# Altium PCB MI.PcbDoc
Units mil, origin at the board's own origin, x right, y up, seen from the top; angles counter-clockwise.
Board outline 3031.5 x 1181.1 mil, 2 copper layers (Top Layer, Bottom Layer); 112 components, 66 nets, 394 pads, 90 vias.
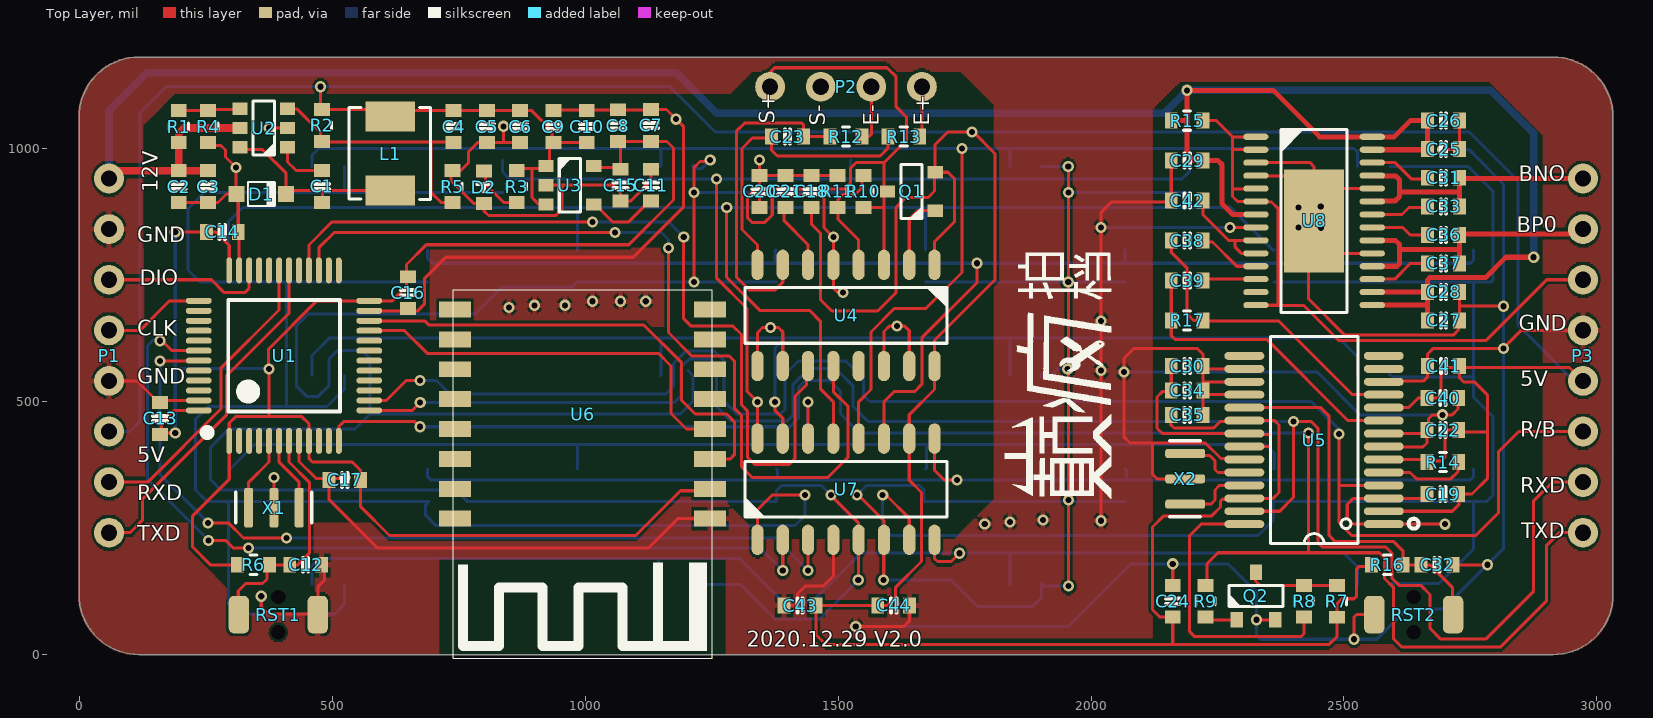
[diagram p0: Top Layer view]
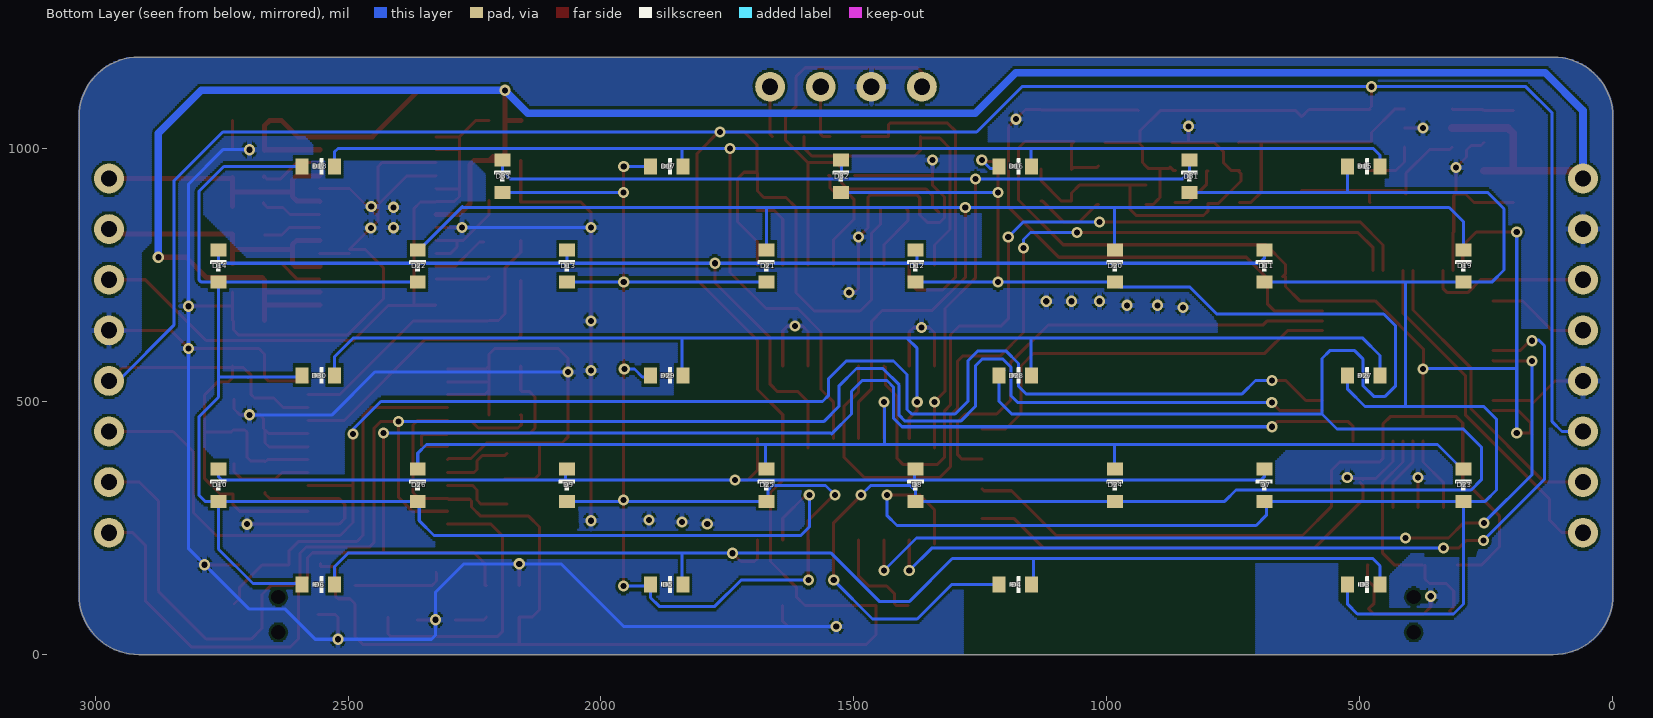
[diagram p1: Bottom Layer view, seen from below]

## Layer stack, top to bottom
Top Solder: solder mask 0.4, Solder Resist, Dk 3.5
Top Layer: signal copper 1.4
Dielectric 1: dielectric 12.6, FR-4, Dk 4.8
Bottom Layer: signal copper 1.4
Bottom Solder: solder mask 0.4, Solder Resist, Dk 3.5

## Board outline
118.11,-0.55 cw(c118.11,117.56) 0,117.56 0,1062.44 cw(c118.11,1062.44) 118.11,1180.55 2913.39,1180.55 cw(c2913.39,1062.44) 3031.5,1062.44 3031.5,117.56 cw(c2913.39,117.56) 2913.39,-0.55

## Design rules (kind name [scope] priority, off if disabled: settings)
Clearance [All] p1: gap=5 ignorepadtopadclearanceinfootprint=TRUE
PlaneClearance [All] p1: clearance=5
PlaneConnect [All] p1: planeconnectstyle=Relief reliefexpansion=10 reliefentries=4 reliefconductorwidth=6 reliefairgap=5
PolygonConnect [All] p1: connectstyle=Relief reliefconductorwidth=10 reliefentries=4 polygonreliefangle="90 Angle" airgapwidth=5
RoutingVias [All] p1: holewidth=12 width=22 viastyle="Through Hole" minholewidth=12 minwidth=22 maxholewidth=12 maxwidth=22
SolderMaskExpansion [All] p1: expansion=4
Width [All] p1: maxlimit=15 minlimit=6 preferedwidth=6
28 further rules are at their usual default settings.

## Components (designator, comment, footprint, x,y, rotation, side; value= is the part's Value field where it differs from the comment)
C1 "104" CAP-0603-L 480,925 r90 top
C2 "106" CAP-0603-L 196.85,924.55 r90 top
C3 "104" CAP-0603-L 255,924.55 r90 top
C4 "33pF" CAP-0603-L 740,1043.31 r90 top
C5 "104" CAP-0603-L 805.83,1043.31 r90 top
C6 "106" CAP-0603-L 871.67,1043.31 r90 top
C7 "104" CAP-0603-L 1130,1045.43 r90 top
C8 "106" CAP-0603-L 1065,1045 r270 top
C9 "106" CAP-0603-L 937.5,1043.31 r270 top
C10 "104" CAP-0603-L 1003.33,1043.31 r270 top
C11 "22nF" CAP-0603-L 1130,927.43 r90 top
C12 "0.1uF" CAP-0603-L 447.76,177.17 r0 top
C13 "104" CAP-0603-L 160,466.5 r90 top
C14 "104" CAP-0603-L 283,835 r0 top
C15 "104" CAP-0603-L 1070,927.43 r270 top
C16 "104" CAP-0603-L 650,715 r270 top
C17 "104" CAP-0603-L 525,345 r180 top
C18 "10uF" CAP-0603-L 1447.5,915 r270 top
C19 "0.1uF" CAP-0603-L 2695.41,317.06 r180 top
C20 "10uF" CAP-0603-L 1345,915 r270 top
C21 "0.1uF" CAP-0603-L 1396.25,915 r90 top
C22 "0.1uF" CAP-0603-L 2695.41,443.53 r180 top
C23 "0.1uF" CAP-0603-L 1400,1023.62 r180 top
C24 "0.1uF" CAP-0603-L 2161.56,105 r90 top
C25 "0.1uF" CAP-0603-L 2696.83,998.57 r0 top
C26 "0.1uF" CAP-0603-L 2696.83,1055 r0 top
C27 "10F" CAP-0603-L 2696.83,660 r0 top
C28 "01uF" CAP-0603-L 2696.83,716.43 r0 top
C29 "0.1uF" CAP-0603-L 2190.11,976 r0 top
C30 "0.1uF" CAP-0603-L 2190.11,570.01 r0 top
C31 "0.1uF" CAP-0603-L 2696.83,942.14 r0 top
C32 "0.1uF" CAP-0603-L 2684.02,177.17 r0 top
C33 "0.1uF" CAP-0603-L 2696.83,885.71 r0 top
C34 "47uF" CAP-0603-L 2190.11,521.8 r0 top
C35 "0.1uF" CAP-0603-L 2190.11,473.59 r0 top
C36 "0.1uF" CAP-0603-L 2696.83,829.29 r0 top
C37 "0.1uF" CAP-0603-L 2696.83,772.86 r0 top
C38 "1uF" CAP-0603-L 2190.11,818 r180 top
C39 "1uF" CAP-0603-L 2190.11,739 r180 top
C40 "47uF" CAP-0603-L 2695.41,506.77 r0 top
C41 "0.1uF" CAP-0603-L 2696.83,570.01 r180 top
C42 "1uF" CAP-0603-L 2190.11,897 r0 top
C43 "47uF" CAP-0603-L 1425,96.67 r180 top
C44 "0.1uF" CAP-0603-L 1610,96.67 r0 top
D1 "B5819WS" SOD_323 360,910 r180 top
D2 "LED_Power" LED_0603-L 800,923.56 r90 top
D3 "LED_Power" LED_0603-L 492.13,137.8 r180 bottom
D4 "LED_Power" LED_0603-L 1181.1,137.8 r180 bottom
D5 "LED_Power" LED_0603-L 1870.08,137.8 r180 bottom
D6 "LED_Power" LED_0603-L 2559.06,137.8 r180 bottom
D7 "LED_Power" LED_0603-L 688.98,334.65 r90 bottom
D8 "LED_Power" LED_0603-L 1377.95,334.65 r90 bottom
D9 "LED_Power" LED_0603-L 2066.93,334.65 r90 bottom
D10 "LED_Power" LED_0603-L 2755.91,334.65 r90 bottom
D11 "LED_Power" LED_0603-L 688.98,767.72 r90 bottom
D12 "LED_Power" LED_0603-L 1377.95,767.72 r90 bottom
D13 "LED_Power" LED_0603-L 2066.93,767.72 r90 bottom
D14 "LED_Power" LED_0603-L 2755.91,767.72 r90 bottom
D15 "LED_Power" LED_0603-L 492.13,964.57 r180 bottom
D16 "LED_Power" LED_0603-L 1181.1,964.57 r180 bottom
D17 "LED_Power" LED_0603-L 1870.08,964.57 r180 bottom
D18 "LED_Power" LED_0603-L 2559.06,964.57 r180 bottom
D19 "LED_Power" LED_0603-L 295.28,767.72 r90 bottom
D20 "LED_Power" LED_0603-L 984.25,767.72 r90 bottom
D21 "LED_Power" LED_0603-L 1673.23,767.72 r90 bottom
D22 "LED_Power" LED_0603-L 2362.2,767.72 r90 bottom
D23 "LED_Power" LED_0603-L 295.28,334.65 r90 bottom
D24 "LED_Power" LED_0603-L 984.25,334.65 r90 bottom
D25 "LED_Power" LED_0603-L 1673.23,334.65 r90 bottom
D26 "LED_Power" LED_0603-L 2362.2,334.65 r90 bottom
D27 "LED_Power" LED_0603-L 492.13,551.18 r180 bottom
D28 "LED_Power" LED_0603-L 1181.1,551.18 r180 bottom
D29 "LED_Power" LED_0603-L 1870.08,551.18 r180 bottom
D30 "LED_Power" LED_0603-L 2559.06,551.18 r180 bottom
D31 "LED_Power" LED_0603-L 836.61,944.88 r90 bottom
D32 "LED_Power" LED_0603-L 1525.59,944.88 r90 bottom
D33 "LED_Power" LED_0603-L 2194.88,944.88 r90 bottom
L1 "MHCI04020-100M-R8" L-0420 615,990 r90 top
P1 "DIP 1x8" HDR1X8_2.54_180 59.06,590.55 r180 top value=2.54
P2 "HDR1x4_2.54" HDR1X4_2.54_180 1515.75,1122.05 r270 top
P3 "DIP 1x8" HDR1X8_2.54_180 2972.44,590.55 r0 top value=2.54
Q1 "PNP" SOT-23-3 1645,915 r0 top
Q2 "SS8050" SOT-23-3 2326.12,115.47 r270 top
R1 "100K" R-0603-L 196.85,1043.31 r270 top
R2 "124K" R-0603-L 480,1045.45 r90 top
R3 "4.7K" R-0603-L 865,924.55 r90 top
R4 "30K" R-0603-L 255,1043.31 r90 top
R5 "23.7K" R-0603-L 737.91,924.55 r270 top
R6 "10K" R-0603-L 344.65,177.17 r0 top
R7 "1K" R-0603-L 2486.12,105 r270 top
R8 "1K" R-0603-L 2421.12,105 r90 top
R9 "1K" R-0603-L 2226.12,105 r90 top
R10 "10K" R-0603-L 1550,915 r270 top
R11 "10K" R-0603-L 1498.75,915 r270 top
R12 "1K" R-0603-L 1515.75,1023.62 r180 top
R13 "1K" R-0603-L 1630,1023.62 r180 top
R14 "10K" R-0603-L 2695.41,380.29 r0 top
R15 "10K" R-0603-L 2190.11,1055 r180 top
R16 "10K" R-0603-L 2585.59,177.17 r0 top
R17 "10K" R-0603-L 2190.11,660 r0 top
RST1 "按键" KEY_2S 393.7,78.74 r0 top
RST2 "按键" KEY_2S 2637.8,78.74 r180 top
U1 "STM32F103Cx" LQFP_48 405,590.55 r0 top
U2 "MP2456" SOT-23-6 365,1040.43 r0 top
U3 "RT9193" SOT-23-5 970,927.43 r180 top
U4 "HX711" SOP_E150_16 1515.75,670 r180 top
U5 "SYN6288" SSOP28-26-209 2440.94,423.7 r90 top
U6 "HC-04" HC-25 995,475 r180 top
U7 "TM1650" SOP_E150_16 1515.75,326.5 r0 top
U8 "OEP30Wx2" TSSOP_E170_P0.65_28_PAD 2440.94,856.77 r0 top
X1 "8MHz" XTAL-3213-3 385,290 r180 top
X2 "16MHz" XTAL-3213-3 2186.12,347.06 r90 top

## Footprints (in the part's own frame and the unit in brackets; to place one, negate y for a bottom-side part, rotate by r counter-clockwise, add the part's x,y. Pads: shape width x height; smd on the part's side, far side on the other; paste and mask are expansions set on the pad)
CAP-0603-L [mm]
  rect 0.65x0.8 smd: 1(-0.8,0) 2(0.8,0)
  silkscreen extent -0.13,-0.35 0.13,0.35, body extent -0.8,-0.4 0.8,0.4, height 0.8
HC-25 [mm]
  rect 1.6x0.8 smd: 1(-6.4,5.25) 2(-6.4,3.75) 3(-6.4,2.25) 4(-6.4,0.75) 5(-6.4,-0.75) 6(-6.4,-2.25) 7(-6.4,-3.75) 8(-6.4,-5.25) 9(6.4,-5.25) 10(6.4,-3.75) 11(6.4,-2.25) 12(6.4,-0.75) 13(6.4,0.75) 14(6.4,2.25) 15(6.4,3.75) 16(6.4,5.25)
  silkscreen extent -6.5,-6.25 6.5,12.25
HDR1X4_2.54_180 [mm]
  round 1.5 hole 0.813: 1(0,3.81) 2(0,1.27) 3(0,-1.27) 4(0,-3.81)
  body extent -1.25,-5.08 1.25,5.08, height 8.2
HDR1X8_2.54_180 [mm]
  round 1.5 hole 0.813: 1(0,8.89) 2(0,6.35) 3(0,3.81) 4(0,1.27) 5(0,-1.27) 6(0,-3.81) 7(0,-6.35) 8(0,-8.89)
  body extent -1.25,-10.16 1.25,10.16, height 8.2
KEY_2S [mil]
  round 0 hole 28: 0(0,-35) 0(0,35)
  rrect50% 40x74 smd: 1(-78,0) 2(78,0)
  body extent -79,-49 79,49, height 63
L-0420 [mm] "4.1*4.6*2MM(长*宽*高)"
  rect 1.5x2.5 smd: 1(-1.85,0) 2(1.85,0)
  silkscreen extent -2.3,-2.02 2.3,2.07, body extent -2.28,-2.02 2.3,2.07, height 2
LED_0603-L [mm]
  rect 0.65x0.8 smd: 1(0.813,0) 2(-0.813,0)
  silkscreen extent -0.25,-0.39 0.25,0.39, body extent -0.81,-0.4 0.81,0.4, height 0.6
LQFP_48 [mm]
  oval 0.3x1.3 smd: 1(-2.75,-4.28) 2(-2.25,-4.28) 3(-1.75,-4.28) 4(-1.25,-4.28) 5(-0.75,-4.28) 6(-0.25,-4.28) 7(0.25,-4.28) 8(0.75,-4.28) 9(1.25,-4.28) 10(1.75,-4.28) 11(2.25,-4.28) 12(2.75,-4.28) 25(2.75,4.28) 26(2.25,4.28) 27(1.75,4.28) 28(1.25,4.28) 29(0.75,4.28) 30(0.25,4.28) 31(-0.25,4.28) 32(-0.75,4.28) 33(-1.25,4.28) 34(-1.75,4.28) 35(-2.25,4.28) 36(-2.75,4.28)
  oval 1.3x0.3 smd: 13(4.28,-2.75) 14(4.28,-2.25) 15(4.28,-1.75) 16(4.28,-1.25) 17(4.28,-0.75) 18(4.28,-0.25) 19(4.28,0.25) 20(4.28,0.75) 21(4.28,1.25) 22(4.28,1.75) 23(4.28,2.25) 24(4.28,2.75) 37(-4.28,2.75) 38(-4.28,2.25) 39(-4.28,1.75) 40(-4.28,1.25) 41(-4.28,0.75) 42(-4.28,0.25) 43(-4.28,-0.25) 44(-4.28,-0.75) 45(-4.28,-1.25) 46(-4.28,-1.75) 47(-4.28,-2.25) 48(-4.28,-2.75)
  silkscreen extent -3.98,-3.99 2.8,2.8, body extent -4.5,-4.5 4.5,4.5, height 1.52
R-0603-L [mm]
  rect 0.65x0.8 smd: 1(-0.8,0) 2(0.8,0)
  silkscreen extent -0.18,-0.48 0.18,0.48, body extent -0.8,-0.4 0.8,0.4, height 0.45
SOD_323 [mm]
  rect 0.8x0.8 smd: 1(1.25,0) 2(-1.25,0)
  silkscreen extent -0.72,-0.6 0.67,0.6, body extent -1.3,-0.68 1.3,0.68, height 1.1
SOP_E150_16 [mil]
  oval 24x60 smd: 1(-175,-100) 2(-125,-100) 3(-75,-100) 4(-25,-100) 5(25,-100) 6(75,-100) 7(125,-100) 8(175,-100) 9(175,100) 10(125,100) 11(75,100) 12(25,100) 13(-25,100) 14(-75,100) 15(-125,100) 16(-175,100)
  silkscreen extent -200,-55 200,55, body extent -197,-118 197,118, height 69
SOT-23-3 [mil]
  rect 30x24 smd: 1(47,-38) 2(47,38) 3(-47,0)
  silkscreen extent -21,-53 21,53, body extent -55,-57 55,57, height 51
SOT-23-5 [mil]
  rect 30x24 smd: 1(47,-38) 2(47,0) 3(47,38) 4(-47,38) 5(-47,-38)
  silkscreen extent -21,-53 21,53, body extent -55,-57 55,57, height 57
SOT-23-6 [mil]
  rect 30x24 smd: 1(47,-38) 2(47,0) 3(47,38) 4(-47,38) 5(-47,0) 6(-47,-38)
  silkscreen extent -21,-53 21,53, body extent -55,-57 55,57, height 57
SSOP28-26-209 [mm]
  oval 0.4x2 smd: 1(-4.225,-3.5) 2(-3.575,-3.5) 3(-2.925,-3.5) 4(-2.275,-3.5) 5(-1.625,-3.5) 6(-0.975,-3.5) 7(-0.325,-3.5) 8(0.325,-3.5) 9(0.975,-3.5) 10(1.625,-3.5) 11(2.275,-3.5) 12(2.925,-3.5) 13(3.575,-3.5) 14(4.225,-3.5) 15(4.225,3.5) 16(3.575,3.5) 17(2.925,3.5) 18(2.275,3.5) 19(1.625,3.5) 20(0.975,3.5) 21(0.325,3.5) 22(-0.325,3.5) 23(-0.975,3.5) 24(-1.625,3.5) 25(-2.275,3.5) 26(-2.925,3.5) 27(-3.575,3.5) 28(-4.225,3.5)
  silkscreen extent -5.2,-5.25 5.2,2.2
TSSOP_E170_P0.65_28_PAD [mil]
  oval 50x12 smd: 1(-115,166.34) 2(-115,140.75) 3(-115,115.16) 4(-115,89.57) 5(-115,63.98) 6(-115,38.39) 7(-115,12.8) 8(-115,-12.8) 9(-115,-38.39) 10(-115,-63.98) 11(-115,-89.57) 12(-115,-115.16) 13(-115,-140.75) 14(-115,-166.34) 15(115,-166.34) 16(115,-140.75) 17(115,-115.16) 18(115,-89.57) 19(115,-63.98) 20(115,-38.39) 21(115,-12.8) 22(115,12.8) 23(115,38.39) 24(115,63.98) 25(115,89.57) 26(115,115.16) 27(115,140.75) 28(115,166.34)
  rect 118.11x203.94 smd: 29(0,0)
  silkscreen extent -65,-181 65,181, body extent -126,-181 126,181, height 42
XTAL-3213-3 [mm]
  rrect50% 0.45x2 smd: 1(1.27,0) 2(0,0) 3(-1.27,0)
  silkscreen extent -1.91,-0.76 1.91,0.76, body extent -1.9,-0.8 1.9,0.8, height 1

## Part data
C1 C2 C3 C4 C5 C6 C7 C8 C9 C10 C11 C12 C13 C14 C15 C16 C17 C18 C19 C20 C21 C22 C23 C24 C25 C26 C27 C28 C29 C30 C31 C32 C33 C34 C35 C36 C37 C38 C39 C40 C41 C42 C43 C44: library part CAP
D1: library part Diode
D2 D3 D4 D5 D6 D7 D8 D9 D10 D11 D12 D13 D14 D15 D16 D17 D18 D19 D20 D21 D22 D23 D24 D25 D26 D27 D28 D29 D30 D31 D32 D33: library part LED
L1: library part Inductor, "电感"
P1 P3: library part HDR1x8_2.54, "Header", Type="DIP 1x8"
P2: "Header"
Q1: library part BJT_PNP, "Transistor"
Q2: library part BJT_NPN, "Transistor"
R1 R2 R3 R4 R5 R6 R7 R8 R9 R10 R11 R12 R13 R14 R15 R16 R17: library part Res
U2: library part MP2451
U3: library part LP5907MFX
X1 X2: library part XTAL-3215-3

## Via types
v1: diameter 22, hole 12, Top Layer to Bottom Layer, tented both sides, 90 vias

## Nets (pads, with @x,y where several pads share a name; then routed paths per layer and width w, separated by ;. In a path a pad name is that pad's centre, name@x,y a point inside that pad or via, vN(x,y) a via of type N, cw(c..) or ccw(c..) an arc to the next point about the centre after c; other vN are vias at no path point)
A: D3.1 D4.1 D5.1 D6.1 U7.8 | length 2443.7
  Top Layer w6: U7.8 1690.75,189.25 1696.49,183.51 1723.51,183.51 v1(1740,200)
  Bottom Layer w6: D3.1 460.13,175.13 475,190 1145,190 1145,189.5 ; D4.1 1145,141.9 1145,189.5 ; D5.1 1840,139.72 1840,200 ; D6.1 2527.06,172.94 2500,200 1840,200 ; 1145,189.5 1305.5,189.5 1390,105 1450,105 1545,200 v1(1740,200) 1840,200
B: D7.1 D8.1 D9.1 D10.1 U7.9 | length 2263.4
  Top Layer w6: U7.9 1690.75,363.74 1709.49,345 v1(1735,345)
  Bottom Layer w6: D7.1 688.98,351.02 695,345 1380,345 ; D8.1 1380,364.6 1380,345 ; D9.1 2070,363.57 2070,345 ; D10.1 2755.91,350.91 2750,345 2070,345 ; 1380,345 v1(1735,345) 2070,345
BN0: C38.2 R17.2 U5.11 | length 613
  Top Layer w6: C38.2 2158.61,794.72 2190,763.33 2190,672.76 2202.76,660 R17.2 2223,658.61 2371.39,658.61 2516.73,513.27 U5.11
BP0: C39.2 R17.1 U5.9 | length 598.7
  Top Layer w6: C39.2 R17.1 2158.61,629.9 2165.88,622.64 2347.36,622.64 2507.91,462.09 U5.9
C: D11.1 D12.1 D13.1 D14.1 U7.11 | length 2629.9
  Top Layer w6: U7.11@1590.75,408.5 U7.11 1590.75,499.25 1610.75,519.25 1651.25,519.25 1665.75,533.75 1665.75,625.75 1775,735 v1(1775,773.17)
  Bottom Layer w6: D11.1 688.98,782.95 698.76,773.17 1375,773.17 ; D12.1 1375,796.76 1375,773.17 ; D13.1 2066.93,773.17 ; D14.1 2755.91,779.08 2750,773.17 2066.93,773.17 ; 1375,773.17 v1(1775,773.17) 2066.93,773.17
CLK: P1.5 U1.37 | length 201.6
  Top Layer w6: P1.5 120.55,640.55 178.82,698.82 U1.37
CVDD: C30.1 C34.1 U5.21 U5.22 | length 444.9
  Top Layer w6: C30.1 C34.1 2156.81,520 2141.73,520 2130.43,508.7 2130.43,447.13 2141.06,436.5 U5.21 2304.66,434.98 2351.51,434.98 2355.03,431.47 2355.03,414.42 2351.51,410.91 U5.22
CVSS: C2.1 C3.1 C5.1 C6.1 C7.2 C8.1 C9.1 C10.1 C11.2 C12.2 C13.2 C14.2 C15.2 C16.2 C17.2 C18.1 C19.2 C20.1 C21.2 C22.2 C24.2 C25.2 C26.2 C27.2 C28.2 C29.1 C30.2 C32.2 C34.2 C35.2 C40.2 C41.2 C42.1 C43.2 C44.2 D1.1 D2.2 P1.4 P1.7 P2.3 P3.4 Q2.2 R4.1 R5.1 R11.1 RST1.2 RST2.2 U1.8 U1.23 U1.35 U1.47 U2.2 U3.2 U4.5 U4.9 U4.10 U4.14 U4.15 U5.1 U5.3 U5.7 U5.8 U5.12 U5.16 U5.17 U5.18 U5.23 U6.1 U7.4 U8.3 U8.4 U8.8 U8.19 U8.24 U8.29 X1.2 X2.2 | length 13397.3
  Top Layer w6: P1.4 114.49,540.55 157.04,498 C13.2 163.97,501.97 U1.47 ; C2.1 C3.1 274.5,893.06 291.44,910 D1.1 ; R4.1 260.81,1006 280.09,1006 289.15,996.94 289.15,983.16 v1(310,962.31) 310,910.79 D1.1 ; U1.35 316.42,833.09 C14.2 314.5,906.29 D1.1 ; v1(360,115) 360,94.24 374.24,80 470.44,80 RST1.2 482.95,89.99 471.7,101.24 471.7,133.45 485,146.75 485,176.42 C12.2@484.26,177.17 ; v1(375.47,1040.43) U2.2 ; X1.2 v1(385,350) ; U1.8 434.53,381.48 468.05,347.95 493.5,347.95 C17.2@493.5,347.66 ; C17.2 C17.2@493.5,347.66 ; C17.2@500,340 493.5,333.5 493.5,306.5 590,210 1125,210 1183.31,268.31 U6.1 ; v1(525,350) 522.66,347.66 C17.2@493.5,347.66 ; U1.23 669.13,679.13 683,693 683,743.55 724.46,785 1095,785 1195,885 1195,1042.83 v1(1180,1057.83) 1160.91,1076.93 C7.2 1128.93,1075.86 938.57,1075.86 C9.1 ; R5.1 R5.1@740.86,956.04 ; v1(838.75,1043.82) 838.75,1011.81 ; C6.1 838.75,1011.81 ; U3.2 952.57,927.43 ; C11.2 1130,936.28 1089.64,895.93 C15.2 1070,912.05 1054.62,927.43 952.57,927.43 ; U4.9 1340.75,635.85 1350.9,646 v1(1366.6,646) 1382.31,646 1390.75,637.56 U4.10 ; v1(1345,977.31) C20.1 ; C43.2 1416.49,96.67 1420,100.19 1420,120 1435.27,135.27 1471.02,135.27 1490.75,155 U7.4 ; R11.1 C18.1 C20.1 ; v1(1509.56,715.32) 1499.68,715.32 1490.75,724.25 U4.5 v1(1490.75,825) 1472.36,843.38 1472.36,903.64 1467.71,908.29 1375.79,908.29 1370,902.5 1370,868.64 1355.36,854 1330.07,854 1321,863.07 1321,903.92 1345,927.92 C20.1 ; v1(1535,55) 1630,55 1641.5,66.5 C44.2 ; U4.14 1590.75,638.25 1601.35,648.85 v1(1616.53,648.85) 1631.7,648.85 1640.75,639.8 U4.15 ; v1(2020,264.25) v1(2020,561.02) v1(2020,659.28) v1(2020,843.98) 2020,874 2040.05,894.05 2158.61,894.05 C42.1 C29.1 ; C24.2 v1(2161.56,179.07) ; X2.2@2191.12,347.06 X2.2 2130.43,347.06 2121.5,355.99 2121.5,415.92 2123.63,418.05 ; C35.2 C34.2 ; v1(2275,843.98) U8.8 ; U5.23 2301.28,387.18 2256.94,387.18 2226.07,418.05 2123.63,418.05 ; U5.18 2230.14,513.27 C34.2 ; U5.17 2221.61,538.86 ; U5.16 2227.17,564.45 C30.2 ; U8.4 2327.09,945.19 2384.44,945.19 U8.29@2440.94,888.69 ; U8.3 2433.07,971.93 2440.94,964.06 U8.29@2440.94,888.69 ; v1(2327.09,68.47) Q2.2 ; U8.29@2497,792.8 U8.19 ; v1(2520,30) 2520,73.74 2525,78.74 RST2.2 ; U8.24 2497,920.75 U8.29@2440.94,864.69 ; U5.7 2579.65,410 2655.86,410 2663.91,418.05 C22.2@2663.91,441.84 ; U5.8 2656.88,436.5 2662.22,441.84 C22.2@2663.91,441.84 ; U5.12 2579.88,540 2656.61,540 2665.33,548.72 C41.2 2665.33,593.65 2676.68,605 v1(2815,605) 2850.55,640.55 P3.4 ; C19.2@2663.91,320.01 C19.2 2655.4,308.54 U5.3 2518.54,308.54 2506.5,296.5 2506.5,268.5 2517.64,257.36 U5.1 v1(2700,257.36) ; C22.2 C22.2@2663.91,441.84 ; C22.2@2666.68,446.29 2666.68,465.27 2675,473.59 v1(2695,473.59) 2713.82,473.59 2725.23,485 C40.2@2725.23,505.09 ; v1(2695,997.52) 2727.28,997.52 C25.2 C26.2 ; C32.2 v1(2783.35,177.17) ; C28.2 2728.33,688.22 ; v1(2815,688.22) 2728.33,688.22 ; R5.1@740.86,956.04 735,950.18 735,935.86 779.3,891.56 D2.2 800,876.66 809.23,867.43 942.14,867.43 954.43,879.72 954.43,925.57 952.57,927.43 ; R5.1@740.86,956.04 753.91,956.04 770,972.14 770,994.06 787.75,1011.81 C5.1 838.75,1011.81 ; 2123.63,418.05 2077.07,418.05 2065,430.12 v1(2065,558) 2065,585 2085,605 2209.54,605 2221.61,592.93 C30.2 ; C34.2 2221.61,538.86 ; 2221.61,538.86 C30.2 ; U8.29@2440.94,864.69 U8.29@2440.94,888.69 ; U8.29@2440.94,864.69 U8.29 v1(2455,842.72) 2497,800.72 2466.58,800.72 2430,764.13 2430,702.76 2501.76,631 2716,631 2726.14,641.14 2726.14,657.81 C27.2 2728.33,688.22
  Bottom Layer w6: v1(1535,55) 1955,55 2079.07,179.07 v1(2161.56,179.07) 2270.93,179.07 2327.09,122.91 v1(2327.09,68.47) 2327.09,37.91 2335,30 v1(2520,30) 2565,30 2625,90 2696.18,90 v1(2783.35,177.17) 2815,208.82 v1(2815,605) v1(2815,688.22) 2815,929.96 2747.44,997.52 v1(2695,997.52) ; v1(2020,843.98) v1(2275,843.98) ; v1(2065,558) 2447,558 2531.41,473.59 v1(2695,473.59)
  other v1: 1790,258 1840,262 1905,266 850,686 900,690 960,690 1015,698 1070,698 1120,698 2410,843.38 2410,883.73 2454.12,885
D: D15.1 D16.1 D17.1 D18.1 U7.12 | length 2892.4
  Top Layer w6: U7.12 1540.75,499.25 1565,523.5 1565,637.25 1611.25,683.5 1673.5,683.5 1745,755 v1(1745,1000)
  Bottom Layer w6: D15.1 460.13,986.61 473.51,1000 1150,1000 ; D16.1 1150,965.46 1150,1000 ; D17.1 1840,966.49 1840,1000 ; D18.1 2527.06,992.94 2520,1000 1840,1000 ; 1150,1000 v1(1745,1000) 1840,1000
DIG1: D3.2 D7.2 D11.2 D15.2 D19.2 D23.2 D27.2 D31.2 U7.1 | length 3988.1
  Top Layer w6: U7.1@1340.75,218.31 U7.1 1340.75,285.75 1370,315 v1(1435,315)
  Bottom Layer w6: D23.2@298.23,302.65 D7.2 691.69,302.65 685,295.96 685,275 705,255 1415,255 1435,275 v1(1435,315) ; D3.2 524.13,99.13 505,80 315,80 295.28,99.72 D23.2 252.35,302.65 230,325 230,465 255,490 410,490 ; D27.2 524.13,524.13 490,490 410,490 ; D15.2 524.13,912.88 ; D11.2 410,735.72 ; D31.2 524.13,912.88 ; 410,490 410,735.72 ; 410,735.72 D19.2 239.28,735.72 215,760 215,880.72 247.17,912.88 524.13,912.88
DIG2: D4.2 D8.2 D12.2 D16.2 D20.2 D24.2 D28.2 D32.2 U7.5 | length 5049.4
  Top Layer w6: v1(1215,735.72) v1(1215,912.88) 1215,962.06 1227.31,974.38 1244.38,974.38 v1(1247.31,977.31) ; v1@1482.62,317.38 1485.55,314.45 1540.75,259.25 U7.5 1540.37,226.13 1540.37,147.12 v1(1540,146.75)
  Bottom Layer w6: D28.2@1203.31,560.98 D28.2 1213.1,499.8 1188.31,475 575,475 ; D4.2 1307.2,137.8 1375,70 1463.25,70 v1(1540,146.75) v1@1546.2,146.75 ; D16.2 1213.1,967.52 1220.62,960 1230,960 v1(1247.31,977.31) ; v1(1215,912.88) D32.2 ; D12.2 v1(1215,735.72) D20.2 974.46,725.92 835.92,725.92 782.96,672.96 452.96,672.96 430,650 430,530 450,510 472.74,510 494.25,531.51 494.25,584.25 510.39,600.39 559.61,600.39 575,585 575,475 ; v1(1486.1,315) 1467.1,334 1389,334 1377.95,322.95 D8.2 D24.2 767.35,302.65 745,325 280,325 260,345 260,410 295.47,445.47 545.47,445.47 575,475
DIG3: D5.2 D9.2 D13.2 D17.2 D21.2 D25.2 D29.2 D33.2 U7.6 | length 2766.6
  Top Layer w6: v1@1535.79,319.21 1538.6,316.4 1590.75,264.25 U7.6 1590.37,226.13 1590.37,147.12 v1(1590,146.75) ; v1(1955,964.57) 1955.27,964.3 1955.27,135.27 v1(1955.54,135)
  Bottom Layer w6: v1(1537.2,315) 1556.2,334 1661,334 1670.28,324.72 1670.28,302.65 D25.2 D9.2 ; v1(1590,146.75) 1723.25,146.75 1775,95 1885,95 1902.08,112.08 D5.2 1902.08,140.75 1907.83,135 v1(1955.54,135) ; D21.2 v1(1955,735.72) D13.2 ; D29.2@1902.08,548.23 D29.2 1902.08,554.13 1907.98,548.23 1918.23,548.23 1933.93,563.93 v1(1953.93,563.93) ; D17.2 v1(1955,964.57) ; v1(1955.54,912.88) D33.2
  other v1: 1955.54,305
DIG4: D6.2 D10.2 D14.2 D18.2 D22.2 D26.2 D30.2 U7.7 | length 3174.2
  Top Layer w6: v1(1588.3,315) 1595,315 1640.75,269.25 U7.7
  Bottom Layer w6: v1(1588.3,315) 1588.3,251.7 1605,235 2330,235 2359.25,264.25 2359.25,302.65 D26.2 D10.2@2752.95,302.65 ; D22.2 D14.2 ; D6.2 2593.26,140 2688,140 2755.91,207.91 D10.2 2782.65,302.65 2795,315 2795,469.25 2755.91,508.35 2755.91,548.23 ; D30.2 2591.06,554.13 2596.96,548.23 2698.23,548.23 ; D18.2 2745.43,964.57 2795,915 2795,740.72 2790,735.72 D14.2 ; 2697.5,547.5 2698.23,548.23 ; 2698.23,548.23 2755.91,548.23 ; 2755.91,548.23 D14.2
DIO: P1.6 U1.34 | length 326.5
  Top Layer w6: P1.6 261.5,740.55 287.05,715 327.3,715 336.1,723.8 U1.34
DOUT: U1.27 U4.12 | length 1734.5
  Top Layer w6: U1.27 473.9,803.9 504,834 v1(1059.43,834) ; v1(1165,803.27) 1165,636.06 1211.06,590 1285,590 1295,580 1295,486.5 1309,472.5 1309,371.03 1330.03,350 1480,350 1520,390 1520,490 1490.75,519.25 U4.12
  Bottom Layer w6: v1(1059.43,834) 1151,834 1165,820 v1(1165,803.27)
DP: D31.1 D32.1 D33.1 U7.16 | length 2017.6
  Top Layer w6: v1(1260,940) 1260,743.78 1320,683.78 1320,520 v1(1340.75,499.25) U7.16 U7.16@1340.75,408.5
  Bottom Layer w6: D31.1 836.61,953.39 850,940 v1(1260,940) 1525,940 ; D32.1 1525,976.29 1525,940 ; D33.1 2195,976.76 2195,955 2180,940 1525,940
E: D19.1 D20.1 D21.1 D22.1 U7.13 | length 2940.1
  Top Layer w6: v1(1280,883.51) 1280,745 1345,680 1443.61,680 1465,658.61 1465,525 1490.75,499.25 U7.13
  Bottom Layer w6: D19.1 295.28,855.28 323.51,883.51 985,883.51 ; D20.1 985,800.46 985,883.51 ; D21.1 1673.23,883.51 ; D22.1 2359.25,799.72 2273.97,885 2272.48,883.51 1673.23,883.51 ; 985,883.51 v1(1280,883.51) 1673.23,883.51
F: D23.1 D24.1 D25.1 D26.1 U7.14 | length 2380.3
  Top Layer w6: U7.14 v1(1440.75,499.25)
  Bottom Layer w6: D23.1 298.23,366.65 346.58,415 985,415 ; D24.1 985,367.39 985,415 ; v1(1440.75,499.25) 1440,498.5 1440,415 ; D25.1 1675,368.42 1675,415 ; D26.1 2362.2,397.8 2345,415 1675,415 ; 985,415 1440,415 ; 1440,415 1675,415
G: D27.1 D28.1 D29.1 D30.1 U7.15 | length 2539.2
  Top Layer w6: v1(1375,499.25) 1375,482.5 1390.75,466.75 U7.15
  Bottom Layer w6: D27.1 460.13,590.87 494.25,625 1150,625 ; D28.1 1150,552.08 1150,625 ; v1@1375,495 v1(1375,499.25) 1375,605 1395,625 ; D29.1 1840,553.1 1840,625 ; D30.1 2527.06,587.94 2490,625 1840,625 ; 1150,625 1395,625 ; 1395,625 1840,625
NetC1_1: C1.1 D1.2 L1.1 U2.6 | length 386.4
  Top Layer w6: U2.6 322.87,997.56 362.44,997.56 409.21,950.79 D1.2 416.38,917.17 481.49,917.17 ; C1.1 481.49,895 481.49,917.17 ; L1.1 481.49,917.17
NetC1_2: C1.2 U2.1 | length 104
  Top Layer w6: U2.1 412,973.43 428.93,956.5 C1.2
NetC4_1: C4.1 R2.1 R5.2 U2.3 | length 516.6
  Top Layer w6: U2.3 430.21,1078.43 477.04,1031.6 477.04,1013.96 R2.1 481.07,1012.88 695,1012.88 ; R5.2 715.67,893.05 695,913.73 695,1012.88 ; C4.1 738.93,1012.88 695,1012.88
NetC11_1: C11.1 U3.4 | length 144.2
  Top Layer w6: U3.4 1020,889.43 1054.43,855 1086.11,855 1127.04,895.94 C11.1
NetC20_2: C20.2 P2.4 Q1.3 R10.2 U4.3 | length 1059.5
  Top Layer w6: C20.2@1332.26,873.71 1342.05,883.5 C20.2 1345,907.75 1357.26,920 1512.12,920 1525,932.88 1525,961.35 1535.79,972.14 1591.29,972.14 ; P2.4 1365.75,1150.75 1374.57,1159.57 1596.91,1159.57 1615,1141.49 1615,1082.4 1635,1062.4 1635,1015.84 1591.29,972.14 ; R10.2 1588.71,883.5 ; U4.3 1590.75,881.46 1588.71,883.5 ; 1588.71,883.5 1590.75,883.5 1590.75,907.75 1591.29,908.29 1591.29,972.14
NetC21_1: C21.1 U4.6 | length 138.4
  Top Layer w6: C21.1 1399.2,883.51 1393.5,877.81 1393.5,857.05 1440.75,809.8 U4.6
NetC23_1: C23.1 R12.2 U4.7 | length 648
  Top Layer w6: U4.7 1390.75,735.75 1375,720 1325,720 1299,746 1299,1034 1315.03,1050.03 1428.83,1050.03 1431.49,1047.37 C23.1 R12.2
NetC23_2: C23.2 R13.2 U4.8 | length 601.4
  Top Layer w6: U4.8 1340.75,809.25 1310,840 1310,1000 1330.67,1020.67 C23.2@1368.5,1020.67 ; C23.2 C23.2@1368.5,1020.67 ; R13.2 1598.5,1000.2 1583.3,985 1380,985 1368.5,996.5 C23.2@1368.5,1020.67
NetC31_1: C31.1 U8.26 | length 133.5
  Top Layer w6: U8.26 2601.07,971.93 2633,940 2660.86,940 C31.1@2665.2,944.34 ; C31.1@2663.72,945.81 C31.1@2665.2,944.34 ; C31.1@2665.2,944.34 2666.68,945.81 2666.68,942.86 C31.1@2665.2,944.34
NetC33_1: C33.1 U8.22 | length 122.4
  Top Layer w6: U8.22 2614.57,869.57 2628.5,883.5 2659.56,883.5 2666.68,890.62 C33.1@2666.68,893.57
NetC36_1: C36.1 U8.21 | length 115.5
  Top Layer w6: U8.21 2616.02,843.98 2630.71,829.29 C36.1
NetC37_1: C37.1 U8.17 | length 122.3
  Top Layer w6: U8.17 2600.12,741.61 2631.37,772.86 C37.1
NetC38_1: C38.1 U8.11 | length 114.6
  Top Layer w6: C38.1@2231.13,815 2240,815 2287.8,767.2 U8.11
NetC39_1: C39.1 U8.12 | length 106.4
  Top Layer w6: C39.1@2221.61,746.49 2226.48,741.61 U8.12
NetC42_2: C42.2 U8.9 U8.10 | length 213.1
  Top Layer w6: C42.2 2221.61,868.39 2271.61,818.39 2285,818.39 ; U8.10 2297.18,792.8 2285,804.97 2285,818.39 ; U8.9 2285,818.39
NetD2_1: D2.1 R3.1 | length 106.2
  Top Layer w6: D2.1 802.95,955.56 802.95,929.48 839.37,893.06 R3.1
NetP2_1: P2.1 R13.1 | length 100.2
  Top Layer w6: R13.1 1665.75,1027.87 P2.1
NetP2_2: P2.2 R12.1 | length 114.4
  Top Layer w6: R12.1 1561.49,1023.62 1565.75,1027.87 P2.2
NetQ1_1: Q1.1 U4.2 | length 148.7
  Top Layer w6: U4.2 1640.75,860.75 1657,877 Q1.1
NetQ2_1: Q2.1 R9.1 | length 64.1
  Top Layer w6: R9.1 2231.15,68.47 Q2.1
NetQ2_3: Q2.3 R7.1 R8.2 | length 182.6
  Top Layer w6: Q2.3 2325,161.35 2325,145 2333.5,136.5 R8.2 R7.1
NetR1_1: R1.1 R4.2 U2.4 | length 122.6
  Top Layer w6: R1.1 R4.2 256.81,1076.62 316.19,1076.62 U2.4
NetR8_1: R8.1 U5.28 | length 572.5
  Top Layer w6: U5.28 2217.36,257.36 2195,235 2195,45 2204.83,35.17 2415.17,35.17 2421.12,41.12 R8.1
NetR10_1: R10.1 R11.2 U4.4 | length 231.4
  Top Layer w6: R11.2 R11.2@1500.2,883.5 ; U4.4 1540.75,819.25 1500.2,859.8 R11.2@1500.2,883.5 ; R10.1 1547.05,946.49 1547.05,922.05 1534,909 1509.56,909 1500.2,899.65 R11.2@1500.2,883.5
NetR14_2: R14.2 U5.5 | length 173.6
  Top Layer w6: U5.5 2630.53,359.72 2643.2,347.06 2711.13,347.06 2725.23,361.15 R14.2@2725.23,377.19
NetU1_5: U1.5 X1.1 | length 148.8
  Top Layer w6: X1.1 335,340 375.13,380.13 375.13,421.71 U1.5
NetU1_6: U1.6 X1.3 | length 148.6
  Top Layer w6: U1.6 395.5,421.71 395.5,380.01 435,340.51 X1.3
NetU5_24: U5.24 X2.1 | length 142.5
  Top Layer w6: X2.1 2189.97,393.2 2234.49,393.2 2245,382.7 2245,365.62 2250.9,359.72 U5.24
NetU5_25: U5.25 X2.3 | length 144.1
  Top Layer w6: X2.3 2237.06,297.06 2245,305 2245,325 2254.13,334.13 U5.25
O_CS: P3.3 R15.1 U8.1 U8.2 U8.5 U8.6 U8.14 | length 1388.6
  Top Layer w6: R15.1 2247.88,1055 2279.76,1023.11 ; U8.5 2325.2,920 2279.76,920 ; U8.2 2279.76,997.52 ; U8.1 2279.76,1023.11 ; P3.3 2900.55,740.55 2780,620 2490,620 2420.57,689.43 2370,689.43 2326.94,689.43 U8.14 2370,690.43 2370,880.95 2356.94,894.01 2327.09,894.01 U8.6 2289.84,895.16 2279.76,905.24 2279.76,920 ; 2279.76,920 2279.76,997.52 ; 2279.76,997.52 2279.76,1023.11
PD_SDK: U1.28 U4.11 | length 1656.6
  Top Layer w6: U1.28 454.21,809.21 500,855 v1(1015,855) ; v1(1195,825) 1195,663.54 1209.7,648.85 1292.51,648.85 1309,632.36 1309,493.25 1320.75,481.5 1320.75,390.12 1335.87,375 1402.3,375 1415,387.7 1415,510 1437.3,532.3 1437.3,566.56 U4.11
  Bottom Layer w6: v1(1015,855) 1165,855 v1(1195,825)
R/B: P3.6 U1.14 U5.4 | length 3200
  Top Layer w6: U1.14 606.97,501.97 646.34,541.34 v1(673.75,541.34) ; v1(2490,436) 2490,334.13 ; U5.4 2490,334.13 ; P3.6@2961.94,430.05 P3.6 2845.55,440.55 2805.55,400.55 2805.55,280 2760.55,235 2515.55,235 2490,260.55 2490,334.13
  Bottom Layer w6: v1(673.75,541.34) 706.47,541.34 732.81,515 1160,515 1175,530 1175,575 1200,600 1255,600 1275,580 1275,500 1300,475 1385.75,475 1395,484.25 1395,553.1 1421.9,580 1515.5,580 1550,545.5 1550,512.14 1562.34,499.8 2435.2,499.8 2490,445 v1(2490,436)
RST: C12.1 R6.2 RST1.1 U1.7 | length 469.8
  Top Layer w6: RST1.1 322.87,85.91 314.5,94.27 314.5,125.14 329.35,140 362.53,140 371.14,148.62 R6.2@371.14,177.17 ; R6.2 C12.1 ; U1.7 414.84,380.16 455,340 455,200 432.17,177.17 C12.1@421.26,177.17
RXD1: P1.1 U1.30 | length 690.2
  Top Layer w6: P1.1 100.55,240.55 125,265 125,306.5 291,472.5 291,550.21 414.84,674.06 U1.30
SPK+: C31.2 C33.2 P3.1 U8.23 U8.25 | length 568.4
  Top Layer w10: U8.23 2557.09,896.31 2601.07,896.31 2610,905.24 2610,915 ; U8.25 2556.68,945.61 2602.25,945.61 2610,937.86 2610,915 ; C33.2 2728.33,913.93 ; P3.1 2729.92,940.55 C31.2 2728.33,913.93 ; 2610,915 2611.07,913.93 2728.33,913.93
SPK-: C36.2 C37.2 P3.2 U8.18 U8.20 | length 575.5
  Top Layer w10: U8.18 2604.34,767.2 2610,772.86 2610,800 ; U8.20 2601.61,818.39 2610,810 2610,800 ; C37.2@2728.32,772.87 2728.32,800 ; P3.2 2962.65,830.76 2728.33,830.76 C36.2 2728.32,800 ; 2610,800 2728.32,800
SRST: C32.1 R16.2 RST2.1 U5.19 | length 749.5
  Top Layer w6: U5.19 2454.12,487.68 2470,471.79 2470,235.96 2483.04,222.92 2598.15,222.92 2617.09,203.98 R16.2 C32.1 2669.51,177.17 2714.07,132.61 2714.07,110.69 RST2.1@2725.23,99.54
TM_SCL: U1.42 U7.2 | length 1768.3
  Top Layer w6: v1(160,620) 163.82,620 183.43,600.39 U1.42 ; v1(256,225) 290.04,225 305.04,210 v1(335,210) ; v1(1390.75,165.75) U7.2
  Bottom Layer w6: v1@158.97,621.03 146.03,621.03 135,610 135,346 v1(256,225) ; v1(335,210) 430,210 1346.5,210 v1(1390.75,165.75)
TM_SDA: U1.43 U7.3 | length 1721.7
  Top Layer w6: v1(160,580) 235.8,580 U1.43 ; v1(255,260) 295,260 325,230 v1(410,230) ; v1(1440.75,165.75) U7.3
  Bottom Layer w6: v1(160,580) 160,355 v1(255,260) ; v1(410,230) 1376.5,230 v1(1440.75,165.75)
TVDD: C4.2 C5.2 C6.2 C9.2 C10.2 C18.2 C19.1 C22.1 C24.1 C35.1 C40.1 C41.1 C43.1 C44.1 L1.2 P1.3 P3.5 Q1.2 R2.2 R3.2 R7.2 R14.1 R16.1 U3.1 U3.3 U4.1 U4.16 U5.2 U5.6 U5.10 U5.20 U5.26 U7.10 | length 10481.1
  Top Layer w6: v1(477.04,1122.05) 477.04,1082.85 R2.2@482.95,1076.95 ; R2.2 R2.2@482.95,1076.95 ; R3.2 867.95,956.05 874.95,963.05 877.26,960.74 895,960.74 ; U3.3 908.71,889.43 899.71,898.43 895,903.14 895,960.74 ; C10.2 C9.2 ; C18.2 1447.5,850 1465.75,831.76 1465.75,700.65 1487.73,678.67 1578.35,678.67 1615,715.32 1615,883.73 1634.42,903.14 1678.14,903.14 1690.75,915.75 1690.75,951.75 Q1.2 ; U4.1 1690.75,815.75 1730,855 1730,940.18 1717.18,953 Q1.2 ; C35.1 2156.81,471.79 2156.81,454.75 2164.07,447.5 2242.5,447.5 2255.22,460.22 2301.28,460.22 U5.20 2362.91,462.09 2371.39,453.61 2371.39,320 2359.93,308.54 U5.26 2301.28,306.68 2259.51,306.68 2256,303.16 2256,291.51 2237.75,273.25 2142.87,273.25 2121.5,251.88 2121.5,88.5 2136.49,73.51 C24.1 2161.56,20 ; R16.1@2554.1,180.12 R16.1 2554.1,174.22 2530,174.22 2525,169.22 2525,115 2520,110 2496.13,110 2486.13,100 R7.2 2486.13,35.17 2470.96,20 2161.56,20 ; U5.2 2714.07,282.95 2726.91,295.79 C19.1 2752.92,317.05 2783.35,347.48 2783.35,440 ; U5.6 2658.9,385.32 R14.1 2666.32,382.7 2692.7,382.7 2700,390 2700,440.01 2703.51,443.53 C22.1 2730.43,440 2783.35,440 ; U5.10 2627.68,487.68 2646.77,506.77 C40.1 2685,506.77 2691.51,513.29 2691.51,551.51 2707.05,567.05 C41.1@2728.32,567.05 ; C41.1 C41.1@2728.32,567.05 ; P3.5 2945.94,567.05 C41.1@2728.32,567.05 ; R2.2@482.95,1076.95 600.89,1076.95 L1.2 626.97,1074.81 C4.2 C5.2 C6.2 894.74,1074.81 934.55,1035 934.55,1011.81 C9.2 ; 895,960.74 918.31,960.74 U3.1 929.71,972.14 929.71,1004.01 C9.2 ; Q1.2 1692,1007.67 1716.83,1032.5 v1(1765,1032.5) 1765,1035 1810,990 1810,740.01 1690.75,620.76 U4.16 1690.75,523.75 1640.75,473.75 U7.10 1640.75,344.25 1665,320 1665,183.51 1613.96,132.48 1613.96,113.96 1596.67,96.67 C44.1 C43.1 1456.49,38.68 1475.18,20 2161.56,20 ; C41.1@2728.32,567.05 2728.32,546.62 2736.08,538.86 2757.48,538.86 2783.35,512.99 2783.35,440
  Bottom Layer w6: P1.3 100.55,440.55 120,460 120,1070 172.05,1122.05 v1(477.04,1122.05) 1167.95,1122.05 1257.5,1032.5 v1(1765,1032.5) 2747.5,1032.5 2844.21,935.79 2844.21,650.79 2954.45,540.55 P3.5
TXD1: P1.2 U1.31 | length 602.5
  Top Layer w6: P1.2 135.55,340.55 280,485 280,565.5 395.16,680.66 U1.31
USART2_Rx: P3.7 U1.13 U5.27 | length 3587
  Top Layer w6: U1.13 658.41,482.28 v1(674.12,498) ; U5.27 2372.95,282.95 2400,310 v1(2400,460) 2435.7,460 2449.12,446.58 2449.12,220.88 2458.08,211.92 2583.08,211.92 2595,200 2595,150.56 2609.06,136.5 2652.04,136.5 2670,118.54 2670,51.68 2691.51,30.16 2780.16,30.16 2875,125 2875,303.54 2912.01,340.55 P3.7
  Bottom Layer w6: v1(674.12,498) 1176.31,498 1190,511.69 1190,567.94 1206.32,584.25 1245.75,584.25 1260,570 1260,490 1289,461 1399.25,461 1410.75,472.5 1410.75,532.81 1442.94,565 1495,565 1530,530 1530,490 1560,460 v1(2400,460)
USART2_Tx: P3.8 R9.2 U1.12 | length 3451.3
  Top Layer w6: U1.12 513.27,450.5 522.77,460 663.48,460 v1(673.48,450) ; R9.2 2229.07,136.5 2229.07,179.07 2250.92,200.92 2430,200.92 ; v1(2430,437.96) 2430,200.92 ; P3.8 2925.55,240.55 2900,215 2900,105 2810,15 2613.51,15 2598.15,30.36 2598.15,131.85 2580,150 2580,191.12 2570.21,200.92 2430,200.92
  Bottom Layer w6: v1(673.48,450) 1405,450 1421.75,466.75 1421.75,528.26 1434.83,541.34 1483.66,541.34 1505,520 1505,475 1544,436 1545.96,437.96 v1(2430,437.96)
USART3_Rx: U1.22 U6.3 | length 964.6
  Top Layer w6: U1.22 683,659.45 691.75,650.7 1116.66,650.7 1191.06,576.3 1191.06,501.87 1217.94,475 1280,475 1295,460 1295,394.48 1286.94,386.42 U6.3
USART3_Tx: U1.21 U6.4 | length 809
  Top Layer w6: U1.21 643.19,639.76 687.96,595 1145,595 1170,570 1170,476.06 1200.59,445.47 U6.4
VCC_3V3_MCU: C7.1 C8.2 C13.1 C14.1 C15.1 C16.1 C17.1 R6.1 U1.1 U1.9 U1.24 U1.36 U1.48 U3.5 U6.2 | length 3851.3
  Top Layer w6: C13.1 C13.1@162.95,437.96 ; v1(190,437.96) C13.1@162.95,437.96 ; v1(190,835) C14.1 270,835 296.73,808.27 U1.36 ; U1.48 187.28,482.28 162.95,457.95 C13.1@162.95,437.96 ; R6.1@308.15,177.17 259.34,177.17 224.41,212.1 224.41,273.96 296.73,346.28 U1.1 296.73,457.23 309.5,470 374.75,470 ; v1@374.75,563.93 374.75,603.77 469.8,698.82 U1.24 618.82,698.82 647.05,727.05 647.05,746.49 C16.1 652.96,746.49 647.05,752.4 647.05,770.59 686.19,809.72 1086.47,809.72 1175,898.25 1175,1001.08 1162.14,1013.94 C7.1 1129.78,1013.72 1065.22,1013.72 C8.2 1070,1008.5 C15.1 1066.75,962.18 1020.25,962.18 U3.5 ; v1(375,563.93) 375,470 440,470 454.21,455.79 U1.9 454.56,421.71 454.56,386.5 460.9,380.16 539.84,380.16 556.49,363.51 C17.1 556.49,292 613.5,235 1100,235 1188.47,323.47 1243.08,323.47 U6.2
  Bottom Layer w6: v1(190,437.96) 190,565 ; v1(190,835) 190,565 ; v1(375,563.93) 373.93,565 190,565
VCC_12V: C2.2 C3.2 C25.1 C26.1 C27.1 C28.1 C29.2 P1.8 R1.2 R15.2 U2.5 U8.7 U8.15 U8.16 U8.27 U8.28 | length 5329.4
  Top Layer w10: R15.2 2190,1055 ; C29.2@2213.81,983.69 C29.2@2220.88,976.62 ; U8.7 2280.43,869.57 2259.05,890.95 2259.05,968.18 2250.62,976.62 C29.2@2220.88,976.62 ; U8.15 2664.93,690.43 ; U8.16 2664.93,716.02 2665.34,715.62 C27.1 ; U8.27 2663.54,997.52 2665.34,995.72 C25.1 2665.34,1045 2655.34,1055 2631.18,1055 2599.29,1023.11 U8.28 2451.89,1023.11 2360,1115 v1(2190,1115) 2190,1055 ; C28.1 2665.34,740.28 2670.06,745 2780,745 2820,785 v1(2875,785) ; 2190,1055 2190,989.38 2202.76,976.62 C29.2@2220.88,976.62
  Top Layer w15: P1.8 74.55,956.05 C2.2 ; C3.2 C2.2 ; U2.5 207.29,1040.43 196.85,1030 R1.2 C2.2
  Bottom Layer w15: P1.8 59.06,1075.01 134.04,1150 1180,1150 1260,1070 2145,1070 v1(2190,1115) 2790,1115 2875,1030 v1(2875,785)
pads on no net: RST1.0 RST2.0 U1.2 U1.3 U1.4 U1.10 U1.11 U1.15 U1.16 U1.17 U1.18 U1.19 U1.20 U1.25 U1.26 U1.29 U1.32 U1.33 U1.38 U1.39 U1.40 U1.41 U1.44 U1.45 U1.46 U4.13 U5.13 U5.14 U5.15 U6.5 U6.6 U6.7 U6.8 U6.9 U6.10 U6.11 U6.12 U6.13 U6.14 U6.15 U6.16 U8.13

## Polygon pours and split planes (outlines as drawn)
CVSS on Bottom Layer "Bottom Layer-CVSS" (hatched Horizontal grid 4 track 5, remove dead copper, pour order 0): 118.11,-0.55 cw(c118.11,117.56) 0,117.56 0,1062.44 cw(c118.11,1062.44) 118.11,1180.55 2913.39,1180.55 cw(c2913.39,1062.44) 3031.5,1062.44 3031.5,117.56 cw(c2913.39,117.56) 2913.39,-0.55
CVSS on Top Layer "CVSS_L01_P002" (hatched Horizontal grid 4 track 5, remove dead copper, pour order 2): 118.11,-0.55 cw(c118.11,117.56) 0,117.56 0,1062.44 cw(c118.11,1062.44) 118.11,1180.55 2913.39,1180.55 cw(c2913.39,1062.44) 3031.5,1062.44 3031.5,117.56 cw(c2913.39,117.56) 2913.39,-0.55

## Other copper
Top Layer:
  pour cut-out: 455.23,122
  pour cut-out: 255,166 290.27,130.73 290.27,114 325.53,78.74 446.7,78.74 446.7,96.7 467.68,117.68 467.68,190 275.47,190 260.81,204.66
  pour cut-out: 2120,26.77 2127,19.77 2161.56,20.03 2800,18.77 2800,20.11 2895,142 2895,1026 2790,1131 2790,1134 2175,1134 2175,1133 2120,1078
  pour cut-out: 1116.66,650.7 1118.51,648.85 1184.21,648.85 1184.21,639.37 1149.85,605
  pour cut-out: 1280,304.11 1280,298.49 1350.9,226.5 1730,226.5 1730,226.68 1810,306.68 1810,1086 1745,1151 1745,1154 1330.94,1154 1280,1103.06
  pour cut-out: 125,1046 189,1110 1303.18,1110 1303.18,804.42 125,805.01
  pour cut-out: 125.82,805 695,805 695,258 128.77,258
  pour cut-out: 710,190 710.75,189.25 1280,189.25 1280,-15 710,-15
Bottom Layer:
  pour cut-out: 2720,358 2732.5,358 2784.5,410 2805.5,389 2805.5,354
  pour cut-out: 2508.39,438 2508.39,351.36 2508.85,350.91 2502.94,345 2360,345 2360,481.81 2380.19,502 2447.85,502
  pour cut-out: 2700,786 2784,870 2790,870 2795,865 2795,785
  pour cut-out: 1233.15,1042 1233.15,1009 1231.58,1007.42 1239,1000 1280,1000 1280,1007.5 1305,1032.5
  pour cut-out: 2155.79,1050 2154.43,1048.64 2154.43,890 2230,890 2230,949 2256,975 2511.76,975 2570.76,975 2570.76,1006.76 2600,1036 2600,1058
  pour cut-out: 635,415 635,412.73 665.73,382 712.22,382 712.22,412.78 710,415
  pour cut-out: 390.37,206 440,156.37 440,80 519.99,80 544.42,104.73 544.42,206
  pour cut-out: 298.42,216.97
  pour cut-out: 1817.78,534 1858.37,534 1858.37,503.17 1855,499.8 1817.78,499.8
  pour cut-out: 120,645 190,645 190,565 140,565 135,570
  pour cut-out: 268.37,194 375,194 375,260.34 245.47,260.34
  pour cut-out: 1537.59,194 1544.85,194 1549.35,189.5 1546.2,186.36 1546.2,146.75 1543.25,146.75 1535,155
  pour cut-out: 1730,1070 1730,1000 1800,1000 1800,1065
  pour cut-out: 2863.23,626.65 2887.88,602 2910,602 2910,794.67 2882.55,822.12 2851.43,791
  pour cut-out: 2342.15,780 2338.96,776.81 2338.96,749.15 2352.39,735.72 2385,735.72 2385,771.19 2378.19,778
  pour cut-out: 2085.52,204.98 2330,204.98 2330,232.65 2217.65,345 2045,345 2041.04,249.46
  pour cut-out: 2351.82,482 2429.42,482 2340.15,392.73 2340.15,390
  pour cut-out: 1248.15,880 1249.85,878.3 1249.85,780 1215,780 1215,883.51
  pour cut-out: 790,662 782.96,654.96 782.96,634 733,634 725,642 725,695 781.96,695 782.96,694
  pour cut-out: 515,200 515,158 544.42,158 544.42,197.42 545,198
  pour cut-out: 665.73,350 665.73,325.73 665,325 700,325 700,340 686,354 670,354
  pour cut-out: 302.15,351.02 303.17,350 318.52,350 318.52,328.52 315,325 310,330 302.15,330
  pour cut-out: 1375,773.17 1400,773.17 1401.2,771.97 1401.2,750 1375,750
  pour cut-out: 448.85,952.58 448.85,915 464.15,915 464.15,952.58
  pour cut-out: 705,190 1285,190 1285,-15 705,-15

## Silkscreen, mask and mechanical layers (free items; w line width, h text height)
Top Overlay:
  drawing of 3328 lines, arcs and shapes, not listed
  text "S+" at 1375,1048.43 h30 r90
  text "S-" at 1475,1045 h30 r90
  text "E-" at 1580,1045 h30 r90
  text "E+" at 1680,1045 h30 r90
  text "BNO" at 2845,935 h30
  text "12V" at 155,913.56 h30 r90
  text "BP0" at 2841.08,834.16 h30
  text "GND" at 115,815 h30
  text "DIO" at 120,730 h30
  text "GND" at 2845,640 h30
  text "CLK" at 115,630 h30
  text "GND" at 115,535 h30
  text "5V" at 2848.9,530.29 h30
  text "R/B" at 2848.9,430 h30
  text "5V" at 115,380 h30
  text "RXD" at 2848.9,320 h30
  text "RXD" at 115,305 h30
  text "TXD" at 2850,230 h30
  text "TXD" at 115,225 h30
  text "2020.12.29 V2.0" at 1320,15 h30
Mechanical 1:
  the board outline again, w9.84